# Altium PCB PCB1.PcbDoc
Units mil, origin at the board's own origin, x right, y up, seen from the top; angles counter-clockwise.
Board outline 2700 x 2100 mil, 2 copper layers (Top Layer, Bottom Layer); 5 components, 32 nets, 42 pads, 0 vias.
Unrouted connection lines stored in the file: 5.
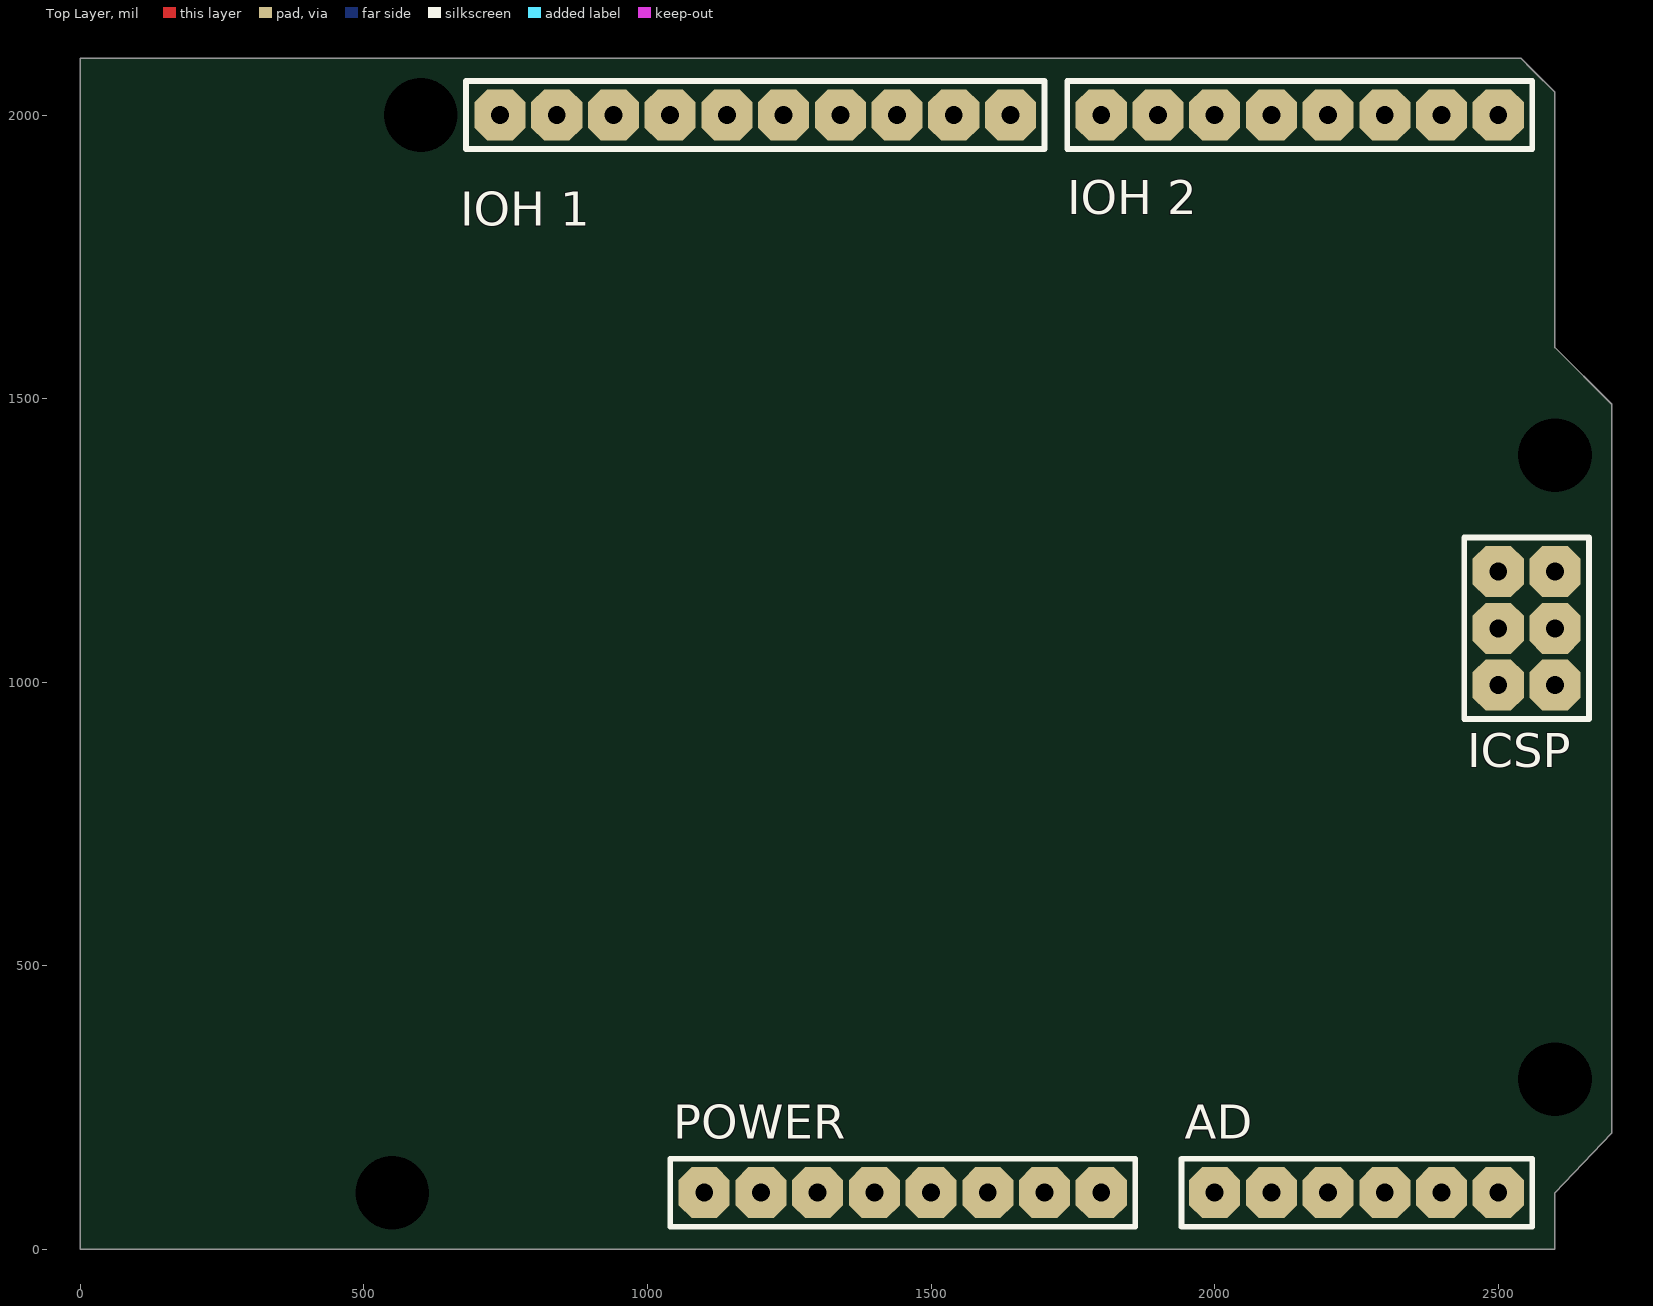
[diagram p0: Top Layer view]
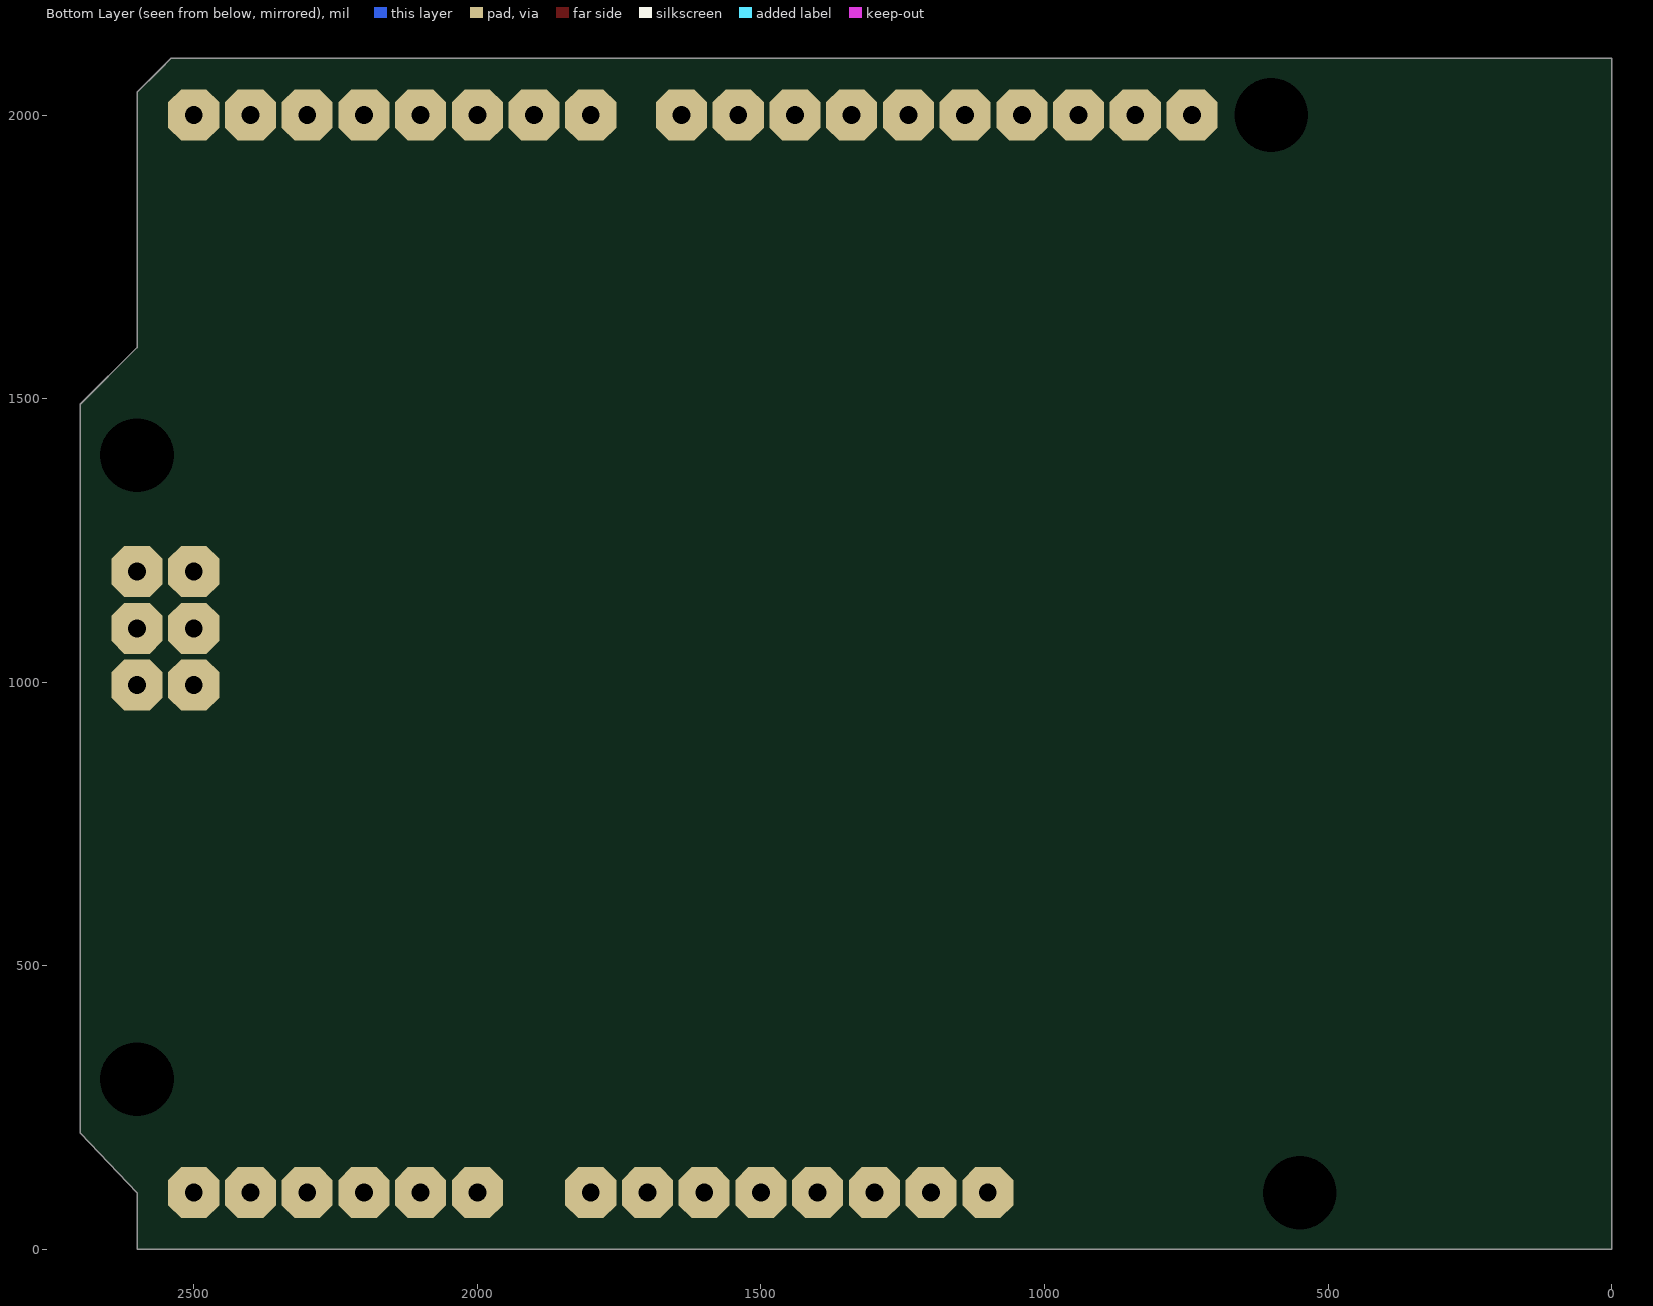
[diagram p1: Bottom Layer view, seen from below]

## Layer stack, top to bottom
Top Solder: solder mask 0.4, Solder Resist, Dk 3.5
Top Layer: signal copper 1.4
Dielectric 1: dielectric 12.6, FR-4, Dk 4.8
Bottom Layer: signal copper 1.4
Bottom Solder: solder mask 0.4, Solder Resist, Dk 3.5

## Board outline
2700,1490 2600,1590 2600,2040 2560,2080 2540,2100 0,2100 0,0 2600,0 2600,100 2700,205

## Design rules (kind name [scope] priority, off if disabled: settings)
Clearance [All] p1: gap=10 ignorepadtopadclearanceinfootprint=FALSE except(0: Arc-Hole Track-Hole SMDPad-Hole THPad-Hole Via-Hole Fill-Hole Poly-Hole Region-Hole Text-Hole)
PolygonConnect [All] p1: connectstyle=Relief reliefconductorwidth=10 reliefentries=4 polygonreliefangle="90 Angle" airgapwidth=10
RoutingVias [All] p1: holewidth=28 width=50 viastyle="Through Hole" minholewidth=28 minwidth=50 maxholewidth=28 maxwidth=50
SolderMaskExpansion [All] p1: expansion=4 istentingtop=FALSE
Width [All] p1: maxlimit=10 minlimit=10 preferedwidth=10
30 further rules are at their usual default settings.

## Components (designator, comment, footprint, x,y, rotation, side; value= is the part's Value field where it differs from the comment)
AD "AD" AD 2201.57,99.67 r90 top
ICSP "ICSP" ICSP 2550,1090 r0 top
"IOH 1" "IOH 1" "IOH 1" 1240,2000 r90 top
"IOH 2" "IOH 2" "IOH 2" 2085,2005 r90 top
POWER "POWER" POWER 1380,100 r90 top

## Footprints (in the part's own frame and the unit in brackets; to place one, negate y for a bottom-side part, rotate by r counter-clockwise, add the part's x,y. Pads: shape width x height; smd on the part's side, far side on the other; paste and mask are expansions set on the pad)
AD [mil]
  oct 90x90 hole 31.5: 1(0.33,201.57) 2(0.33,101.57) 3(0.33,1.57) 4(0.33,-98.43) 5(0.33,-198.43) 6(0.33,-298.43)
  silkscreen extent -60,-358 60,260
ICSP [mil]
  oct 90x90 hole 31.5: 1(-50,105) 2(50,105) 3(-50,5) 4(50,5) 5(-50,-95) 6(50,-95)
  silkscreen extent -110,-155 110,165
"IOH 1" [mil]
  oct 90x90 hole 31.5: 1(0,-400) 2(0,-300) 3(0,-200) 4(0,-100) 5(0,0) 6(0,100) 7(0,200) 8(0,300) 9(0,400) 10(0,500)
  silkscreen extent -60,-460 60,560
"IOH 2" [mil]
  oct 90x90 hole 31.5: 1(-5,-415) 2(-5,-315) 3(-5,-215) 4(-5,-115) 5(-5,-15) 6(-5,85) 7(-5,185) 8(-5,285)
  silkscreen extent -65,-475 55,345
POWER [mil]
  oct 90x90 hole 31.5: 1(0,-420) 2(0,-320) 3(0,-220) 4(0,-120) 5(0,-20) 6(0,80) 7(0,180) 8(0,280)
  silkscreen extent -60,-480 60,340

## Free pads (board coordinates)
  round 90 hole 129.92: 15(550,100) 15(600,2000) 15(2600,300) 15(2600,1400)

## Nets (pads, with @x,y where several pads share a name; then routed paths per layer and width w, separated by ;. In a path a pad name is that pad's centre, name@x,y a point inside that pad or via, vN(x,y) a via of type N, cw(c..) or ccw(c..) an arc to the next point about the centre after c; other vN are vias at no path point)
3V3: POWER.5
5V: ICSP.2 POWER.4
AD0: AD.1
AD1: AD.2
AD2: AD.3
AD3: AD.4
AD4: AD.5
AD5: AD.6
AREF: "IOH 1.8"
GND: "IOH 1.7" ICSP.6 POWER.2 POWER.3
IO0: "IOH 2.1"
IO1: "IOH 2.2"
IO2: "IOH 2.3"
IO3: "IOH 2.4"
IO4: "IOH 2.5"
IO5: "IOH 2.6"
IO6: "IOH 2.7"
IO7: "IOH 2.8"
IO8: "IOH 1.1"
IO9: "IOH 1.2"
IO10: "IOH 1.3"
IO11: "IOH 1.4"
IO12: "IOH 1.5"
IO13: "IOH 1.6"
IOREF: POWER.7
MISO: ICSP.1
MOSI: ICSP.4
RESET: ICSP.5 POWER.6
SCK: ICSP.3
SCL: "IOH 1.10"
SDA: "IOH 1.9"
Vin: POWER.1
pads on no net: POWER.8